# Altium PCB 2025-07-26_00-47-38.PcbDoc
Units mil, origin at the board's own origin, x right, y up, seen from the top; angles counter-clockwise.
Board outline 2000 x 2400 mil, 4 copper layers (Top Layer, MidLayer1, MidLayer2, Bottom Layer); 14 components, 7 nets, 28 pads, 23 vias.
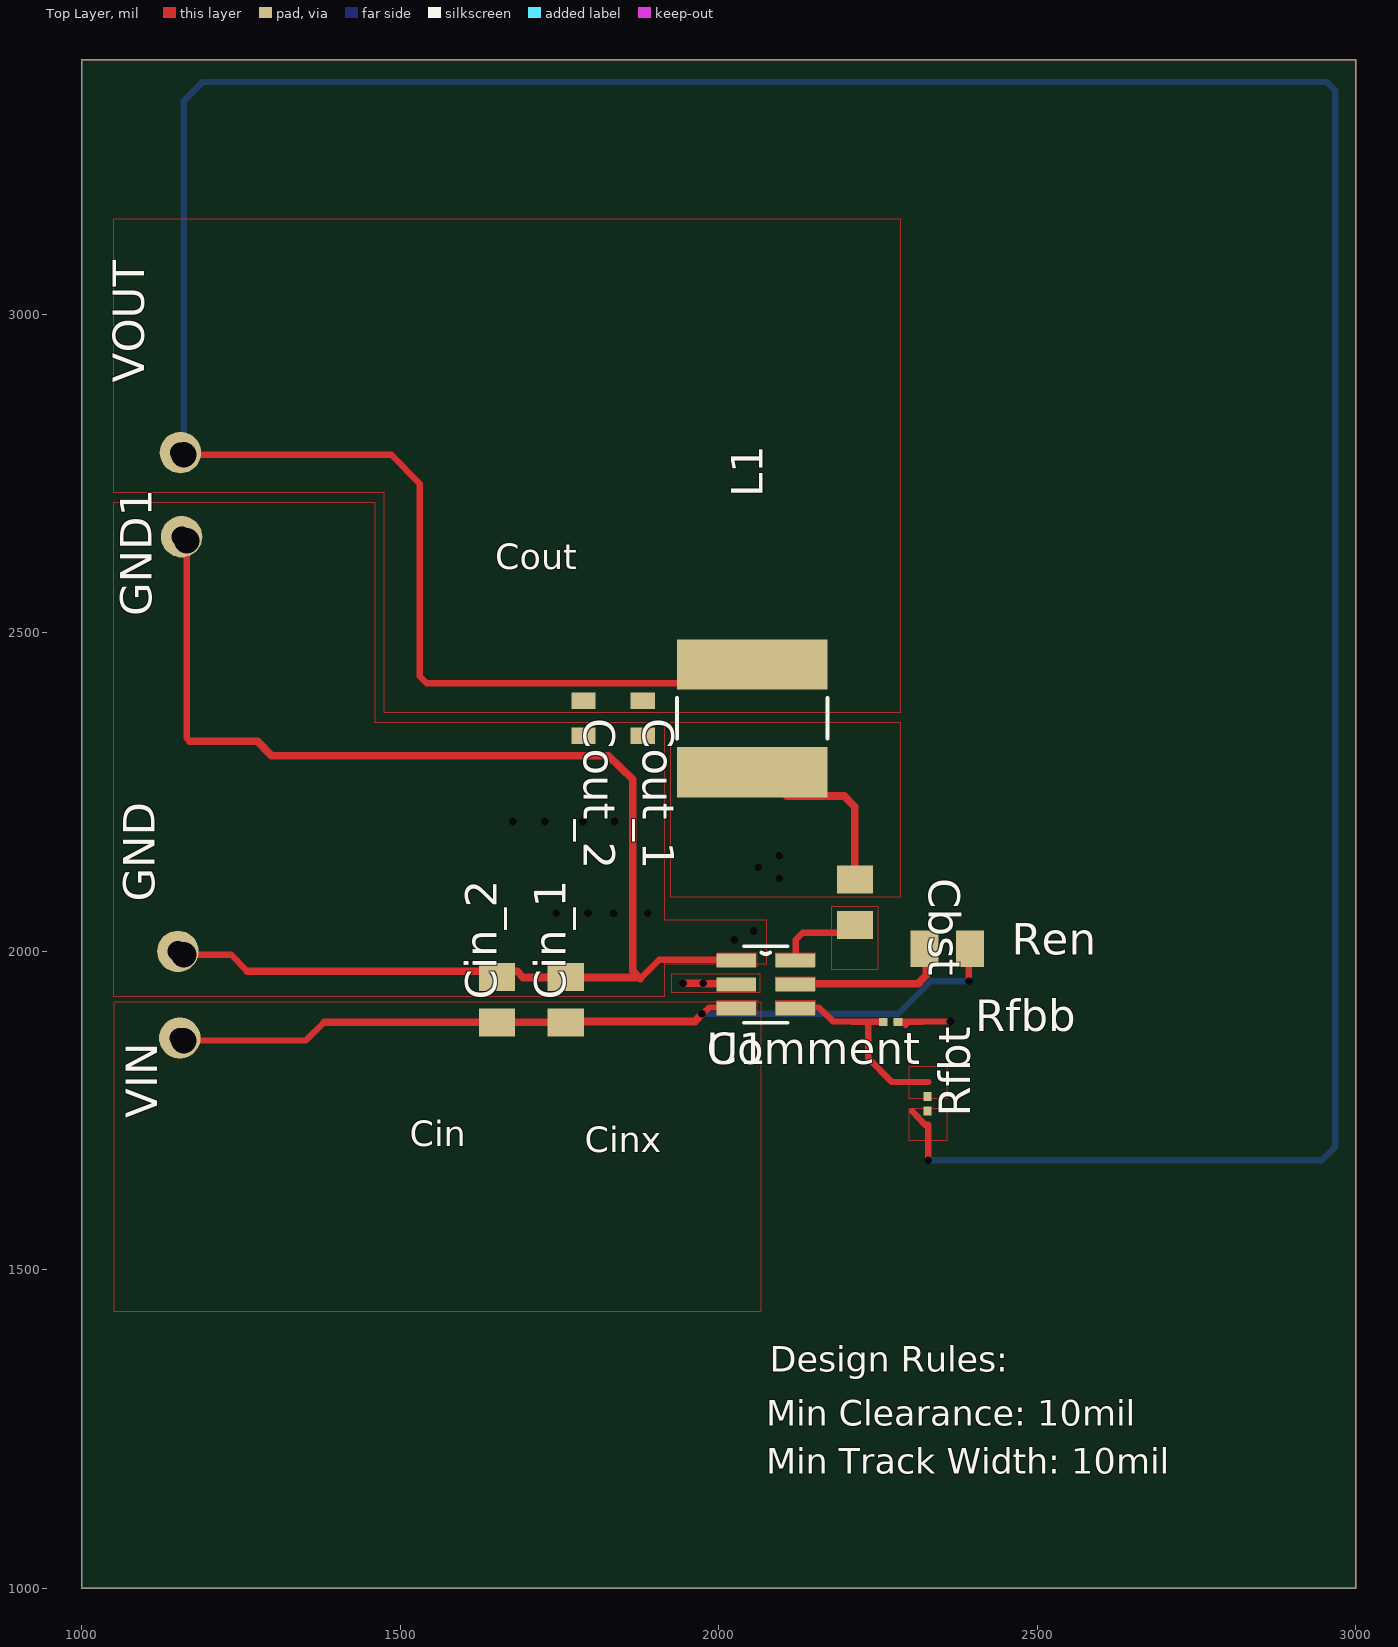
[diagram p0: Top Layer view]
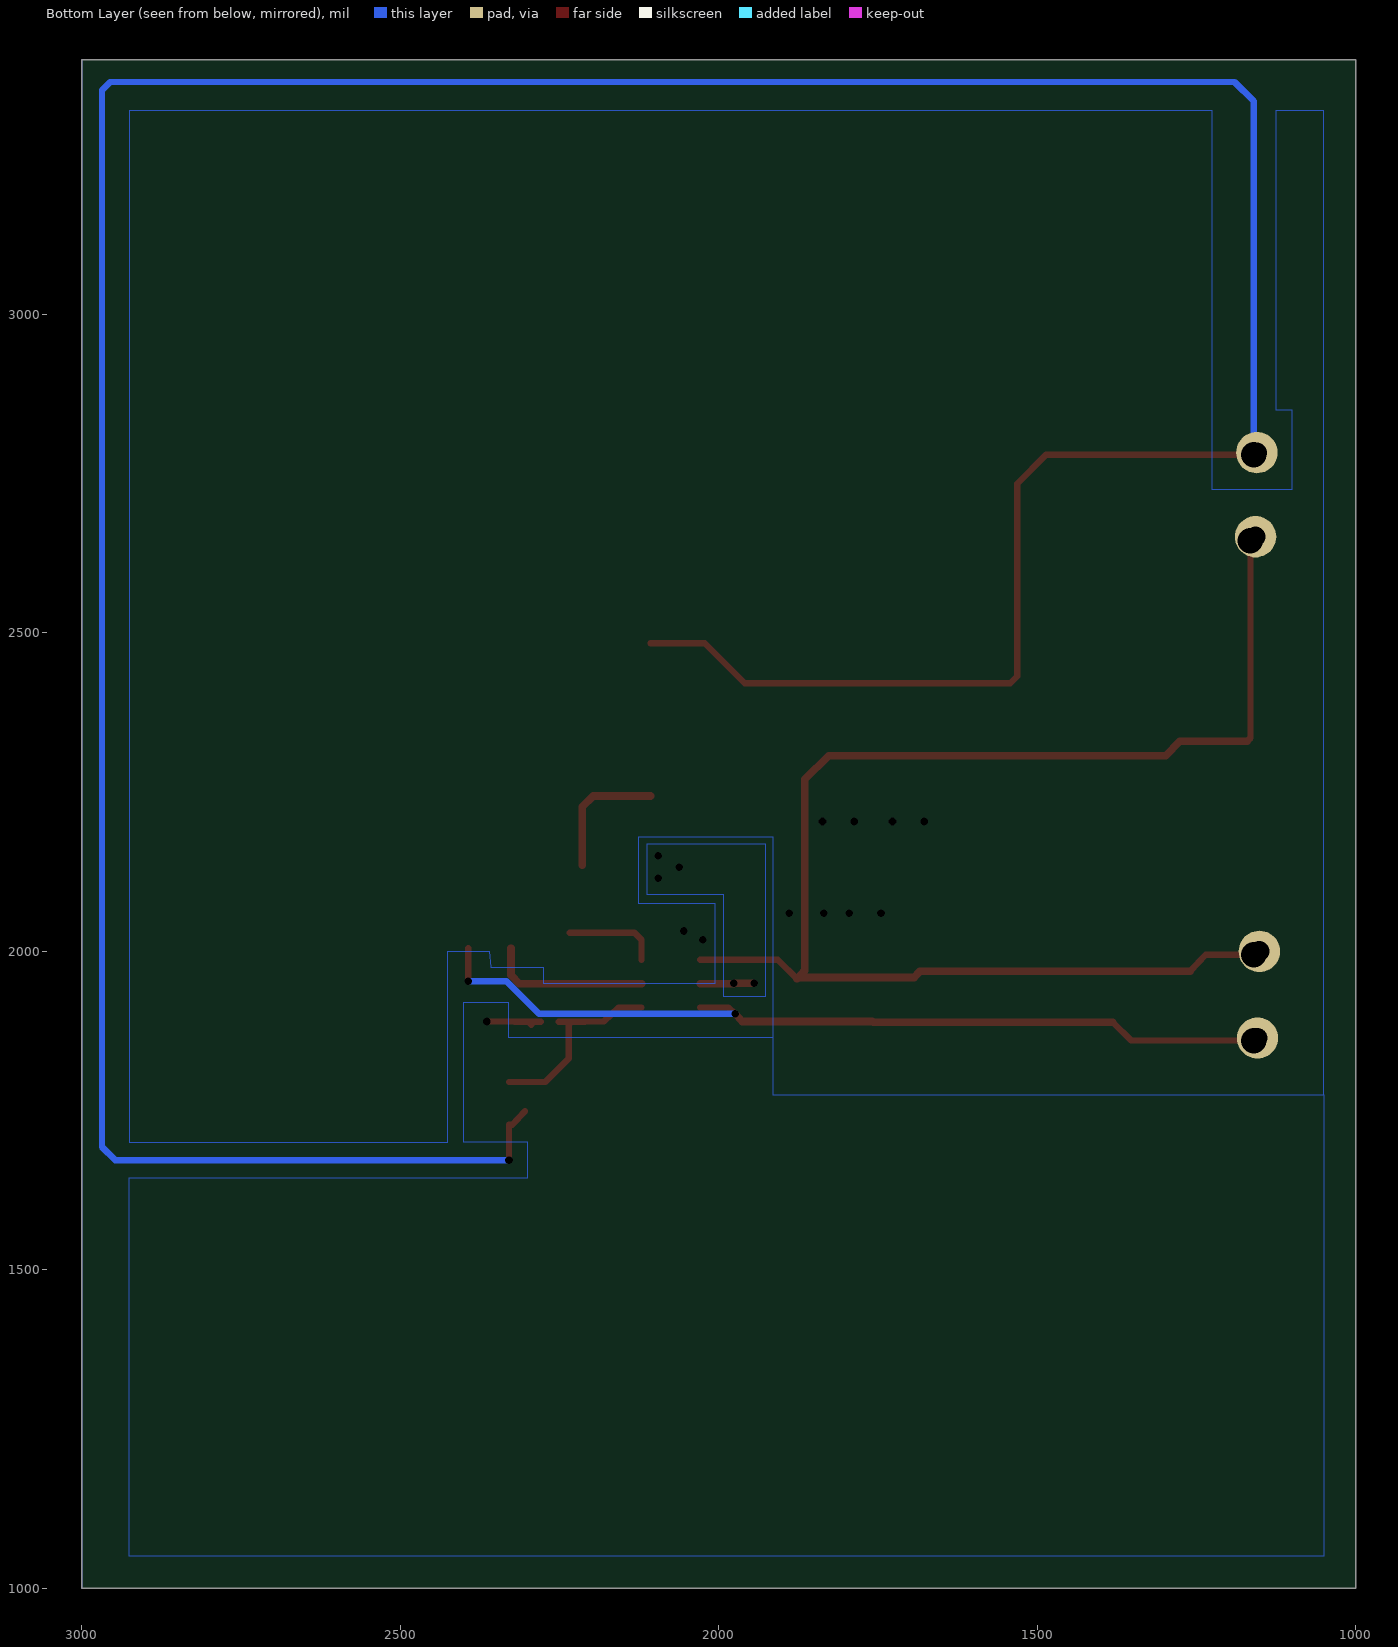
[diagram p1: Bottom Layer view, seen from below]

## Layer stack, top to bottom
Top Layer: signal copper 1.4
Dielectric: core 12.6, FR-4, Dk 4.8
MidLayer1: signal copper 1.4
Dielectric: prepreg 12.6, FR-4, Dk 4.8
MidLayer2: signal copper 1.4
Dielectric: core 12.6, FR-4, Dk 4.8
Bottom Layer: signal copper 1.4

## Board outline
1000,1000 3000,1000 3000,3400 1000,3400

## Design rules (kind name [scope] priority, off if disabled: settings)
PlaneConnect [All] p0: scope1count=1 scope1_0_kind=Board scope1_0_value=Board scope2count=1 scope2_0_kind=Board scope2_0_value=Board commentlength=0 planeconnectstyle=Direct reliefexpansion=20 reliefentries=4 reliefconductorwidth=10 reliefairgap=10
PlaneConnect [All] p1: planeconnectstyle=Direct reliefexpansion=20 reliefentries=4 reliefconductorwidth=10 reliefairgap=10
PolygonConnect [All] p0: scope1count=1 scope1_0_kind=Board scope1_0_value=Board scope2count=1 scope2_0_kind=Board scope2_0_value=Board commentlength=0 connectstyle=Direct reliefconductorwidth=10 reliefentries=4 polygonreliefangle="90 Angle"
PolygonConnect [All] p1: connectstyle=Direct reliefconductorwidth=10 reliefentries=4 polygonreliefangle="90 Angle"

## Components (designator, comment, footprint, x,y, rotation, side; value= is the part's Value field where it differs from the comment)
Cbst "" 0805 2214,2077 r270 top
Cin_1 "" 0805 1760,1924 r90 top
Cin_2 "" 0805 1652,1924 r90 top
Cout_1 "" 0603 1881,2366 r270 top
Cout_2 "" 0603 1788,2366 r270 top
GND "" TP-1502 1151,2000 r90 top
GND1 "" TP-1502 1157,2651 r90 top
L1 "" SRN6045 2053,2366 r90 top
Ren "" 0805 2359,2004 r0 top
Rfbb "" 0201 2270,1889 r0 top
Rfbt "" 0201 2328,1761 r90 top
U1 "" DDC0006A 2074,1948 r0 top
VIN "" TP-1502 1154,1864 r90 top
VOUT "" TP-1502 1155,2783 r90 top

## Footprints (in the part's own frame and the unit in brackets; to place one, negate y for a bottom-side part, rotate by r counter-clockwise, add the part's x,y. Pads: shape width x height; smd on the part's side, far side on the other; paste and mask are expansions set on the pad)
0201 [mil]
  rect 14x13 smd: 1(-11.5,0) 2(11.5,0)
0603 [mil]
  rect 26x38 smd: 1(-27.5,0) 2(27.5,0)
0805 [mil]
  rect 44x57 smd: 1(-35.5,0) 2(35.5,0)
DDC0006A [mil]
  rect 62x22 smd: 1(-46,37.4) 2(-46,0) 3(-46,-37.4) 4(46,-37.4) 5(46,0) 6(46,37.4)
  silkscreen extent -34,-60 34,60
SRN6045 [mm]
  rect 2x6 smd: 1(-2.15,0) 2(2.15,0)
  silkscreen extent -0.82,-3 0.82,3
TP-1502 [mil]
  round 65 hole 32: 1(0,0)

## Via types
v1: diameter 0, hole 12, Top Layer to Bottom Layer, 19 vias
v2: diameter 0, hole 40, Top Layer to Bottom Layer, 4 vias

## Nets (pads, with @x,y where several pads share a name; then routed paths per layer and width w, separated by ;. In a path a pad name is that pad's centre, name@x,y a point inside that pad or via, vN(x,y) a via of type N, cw(c..) or ccw(c..) an arc to the next point about the centre after c; other vN are vias at no path point)
0: Cin_1.2 Cin_2.2 Cout_1.2 Cout_2.2 GND1.1 GND.1 Rfbb.2 U1.1 | length 2362.7
  Top Layer w10: v2(1160,1995) 1235,1995 1260,1969 ; v2(1165,2645) 1165,2335 1170,2330 ; 1877,1957 1907,1987 U1.1@2029,1987 ; Rfbb.2@2279,1889.5 2320,1889.5 ; 2294,1885 2299,1890 v1(2364,1890)
  Top Layer w12: 1170,2330 1276,2330 1298,2307 1727,2307 1827,2307 1865,2270 1865,1970 1875,1959 ; 1260,1969 1684,1969 1693,1959 1875,1959 ; 1877,1957 1875,1959
  other v1: 2025,2018 2055,2032 1745,2060 1795,2060 1835,2060 1889,2060 1677,2204 1727,2204 1787,2204 1837,2204
2: Cin_1.1 Cin_2.1 Ren.2 U1.3 VIN.1 | length 1382.5
  Top Layer w10: v2(1160,1860) 1352,1860 1381,1889 ; v1(1974,1902) 1985,1912 U1.3@2029,1912 ; v1(2393,1953) Ren.2@2393,2005
  Top Layer w12: 1381,1889 1757,1889 1759,1890 1963,1890 v1(1974,1902)
  Bottom Layer w10: v1(1974,1902) 2282,1902 2333,1953 v1(2393,1953)
5: Rfbb.1 Rfbt.2 U1.4 | length 328.2
  Top Layer w10: U1.4@2121,1912 2157,1912 2180,1890 2231,1890 2231,1889 ; 2210,1889.5 2251,1889.5 ; 2235,1890 2235,1832 2272,1795 2329,1795
8: Cbst.1 L1.1 U1.2 | length 292
  Top Layer w12: v1(1944,1950) v1(1976,1950) 1976,1949 U1.2@2029,1949 ; L1.1@2107,2244 2197,2244 2214,2227 2214,2135
  other v1: 2095,2115 2062,2132 2095,2150
9: Cout_1.1 Cout_2.1 L1.2 Rfbt.1 VOUT.1 | length 6076.5
  Top Layer w10: v2(1160,2780) 1486,2780 1531,2734 1531,2432 1542,2421 1727,2421 1959,2421 2022,2484 L1.2@2107,2484 ; 2304,1749 2324,1728 2329,1728 v1(2329,1672)
  Bottom Layer w10: v2(1160,2780) 1160,3335 1190,3365 2955,3365 2968,3352 2968,1693 2947,1672 v1(2329,1672)
13: Cbst.2 U1.6 | length 148.6
  Top Layer w10: U1.6@2121,1987 2121,2018 2132,2029 Cbst.2@2234,2029
17: Ren.1 U1.5 | length 253.1
  Top Layer w12: U1.5@2121,1949 2313,1949 2326,1963 Ren.1@2326,2005

## Polygon pours and split planes (outlines as drawn)
8 on Bottom Layer " " (solid, pour order 11): 1927,1929 1992,1929 1992,2089 2112,2089 2112,2169 1927,2169
0 on Bottom Layer " " (solid, pour order 14): 1050,1775 1050,1050 2925,1050 2925,1645 2300,1645 2300,1700 2400,1700 2400,1920 2330,1920 2330,1865 1915,1865 1915,1775
0 on Bottom Layer " " (solid, pour order 15): 1050,3320 1125,3320 1125,2850 1100,2850 1100,2725 1225,2725 1225,3320 2925,3320 2925,1700 2425,1700 2425,2000 2360,2000 2358,1975 2275,1975 2275,1950 2005,1950 2005,2075 2125,2075 2125,2180 1915,2180 1915,1775 1050,1775
13 on Top Layer " " (solid, pour order 0): 2178,1971 2178,2071 2250,2071 2250,1971
5 on Top Layer " " (solid, pour order 1): 2299,1769 2299,1820 2358,1820 2358,1769
9 on Top Layer " " (solid, pour order 2): 2299,1703 2299,1754 2358,1754 2358,1703
13 on Top Layer " " (solid, pour order 3): 2090,1976 2090,1998 2152,1998 2152,1976
5 on Top Layer " " (solid, pour order 4): 2090,1901 2090,1923 2152,1923 2152,1901
2 on Top Layer " " (solid, pour order 5): 1998,1901 1998,1923 2060,1923 2060,1901
17 on Top Layer " " (solid, pour order 6): 2090,1938 2090,1960 2152,1960 2152,1938
8 on Top Layer " " (solid, pour order 7): 1925,2360 2285,2360 2285,2085 1925,2085
2 on Top Layer " " (solid, pour order 8): 2067,1920 1050,1920 1050,1435 2067,1435
8 on Top Layer " " (solid, pour order 9): 2065,1936 2065,1964 1995,1964 1926,1964 1926,1936 1995,1936
9 on Top Layer " " (solid, pour order 10): 2285,2375 1475,2375 1475,2720 1050,2720 1050,3150 2285,3150
0 on Top Layer " " (solid, pour order 12): 1998,1976 1998,1998 2060,1998 2060,1976
0 on Top Layer " " (solid, pour order 13): 2075,1980 1915,1980 1915,1929 1050,1929 1050,2705 1460,2705 1460,2360 1915,2360 1915,2050 2075,2050

## Other copper
Multi-Layer:
  the board outline again, w1

## Silkscreen, mask and mechanical layers (free items; w line width, h text height)
Top Overlay:
  text "Cout" at 1649,2600 h40
  text "Cin" at 1515,1694 h40
  text "Cinx" at 1790,1685 h40
  text "Design Rules:" at 2080,1340 h40
  text "Min Clearance: 10mil" at 2075,1255 h40
  text "Min Track Width: 10mil" at 2075,1180 h40

## Text inside footprints (layer, text, board x,y; h text height)
U1: Top Overlay "Comment" at 1981,1823 h50